# Altium PCB PCB1.PcbDoc (part 1 of 2)
Units mil, origin at the board's own origin, x right, y up, seen from the top; angles counter-clockwise.
Board outline 6000 x 4000 mil, 10 copper layers (Top Layer, Internal Plane 1, Internal Plane 5, Layer 2, Internal Plane 3, Internal Plane 4, Layer 4, Internal Plane 6, Internal Plane 2, Bottom Layer), stack 97.956 mil thick; 84 components, 218 nets, 925 pads, 573 vias.
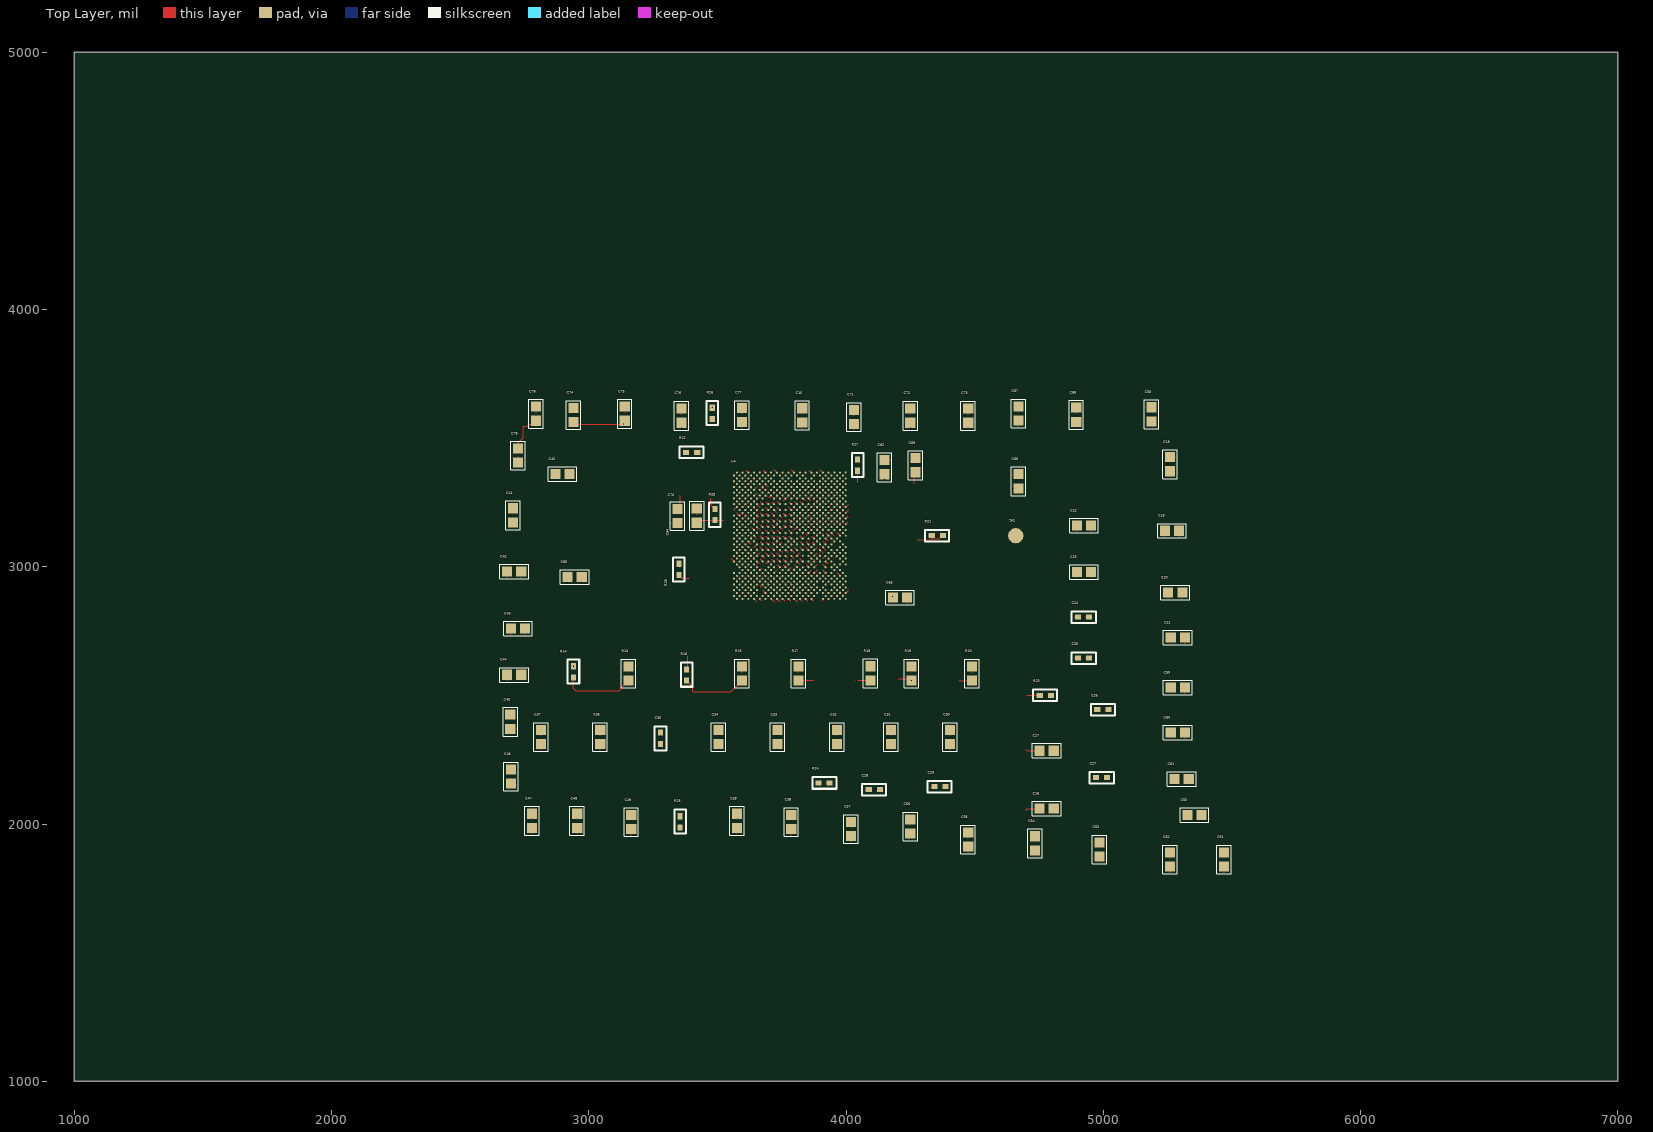
[diagram p0: Top Layer view]
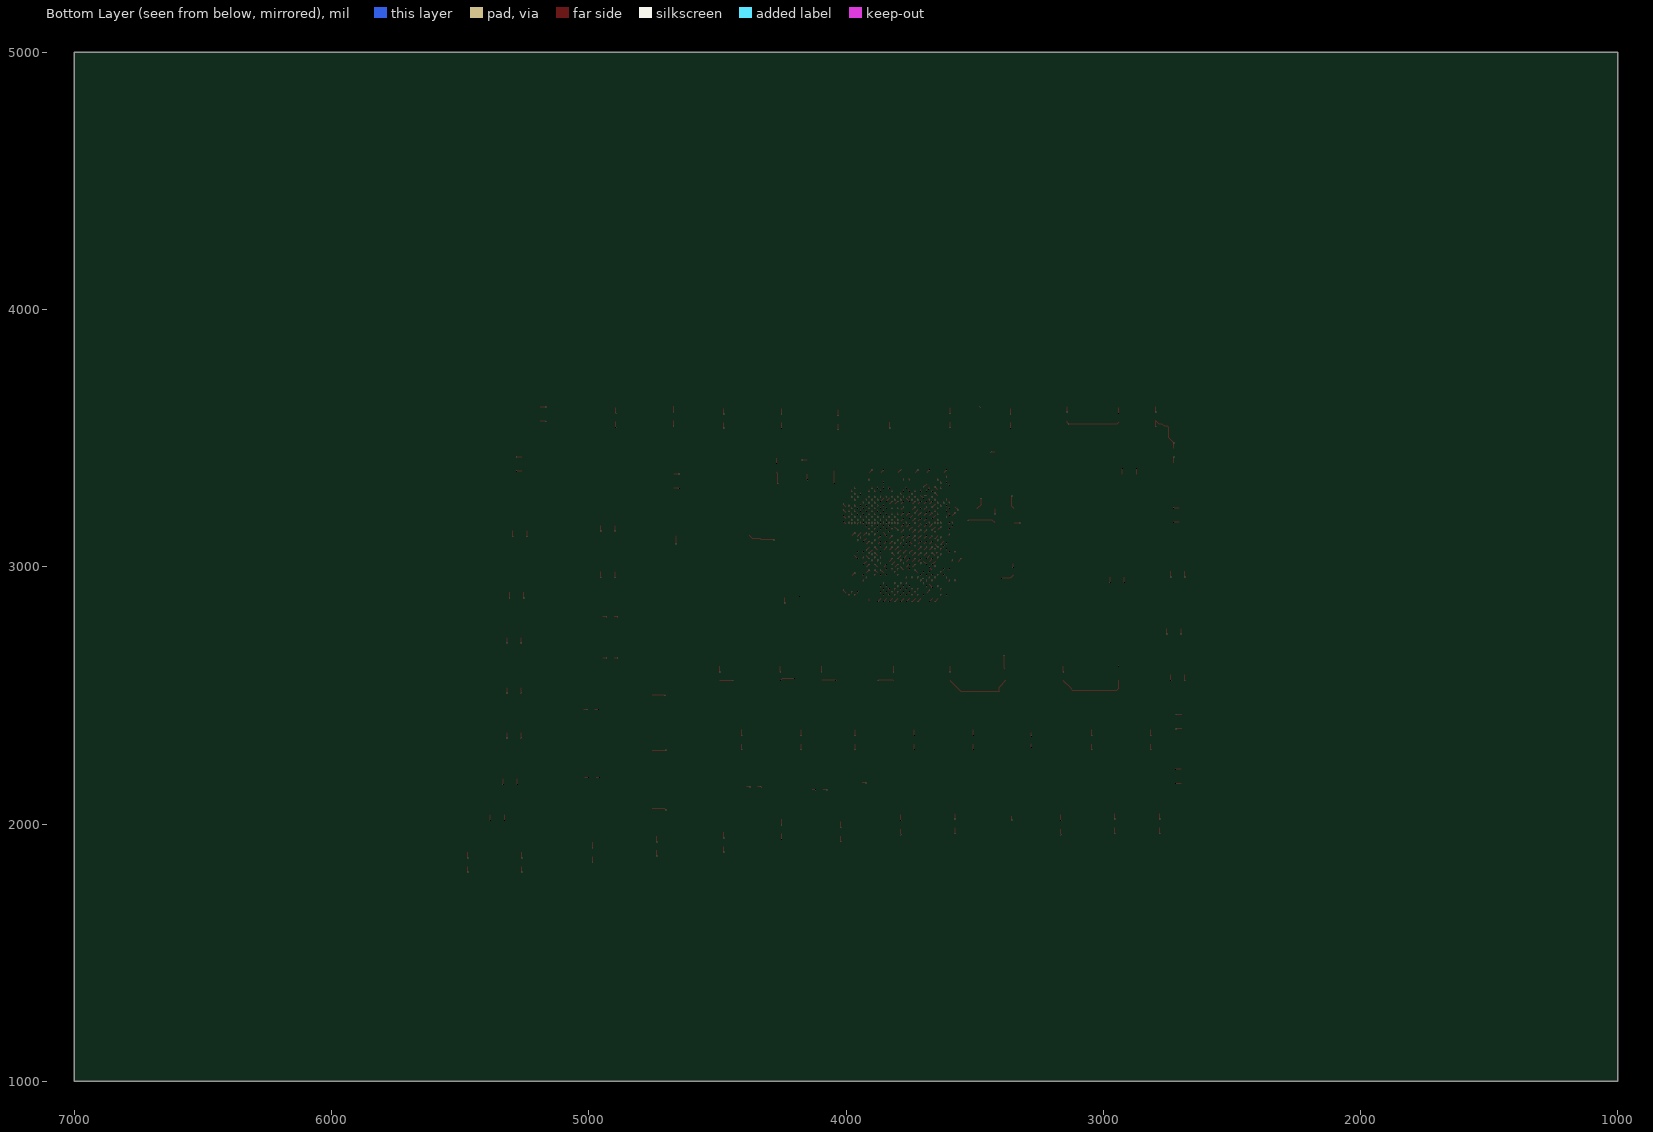
[diagram p1: Bottom Layer view, seen from below]
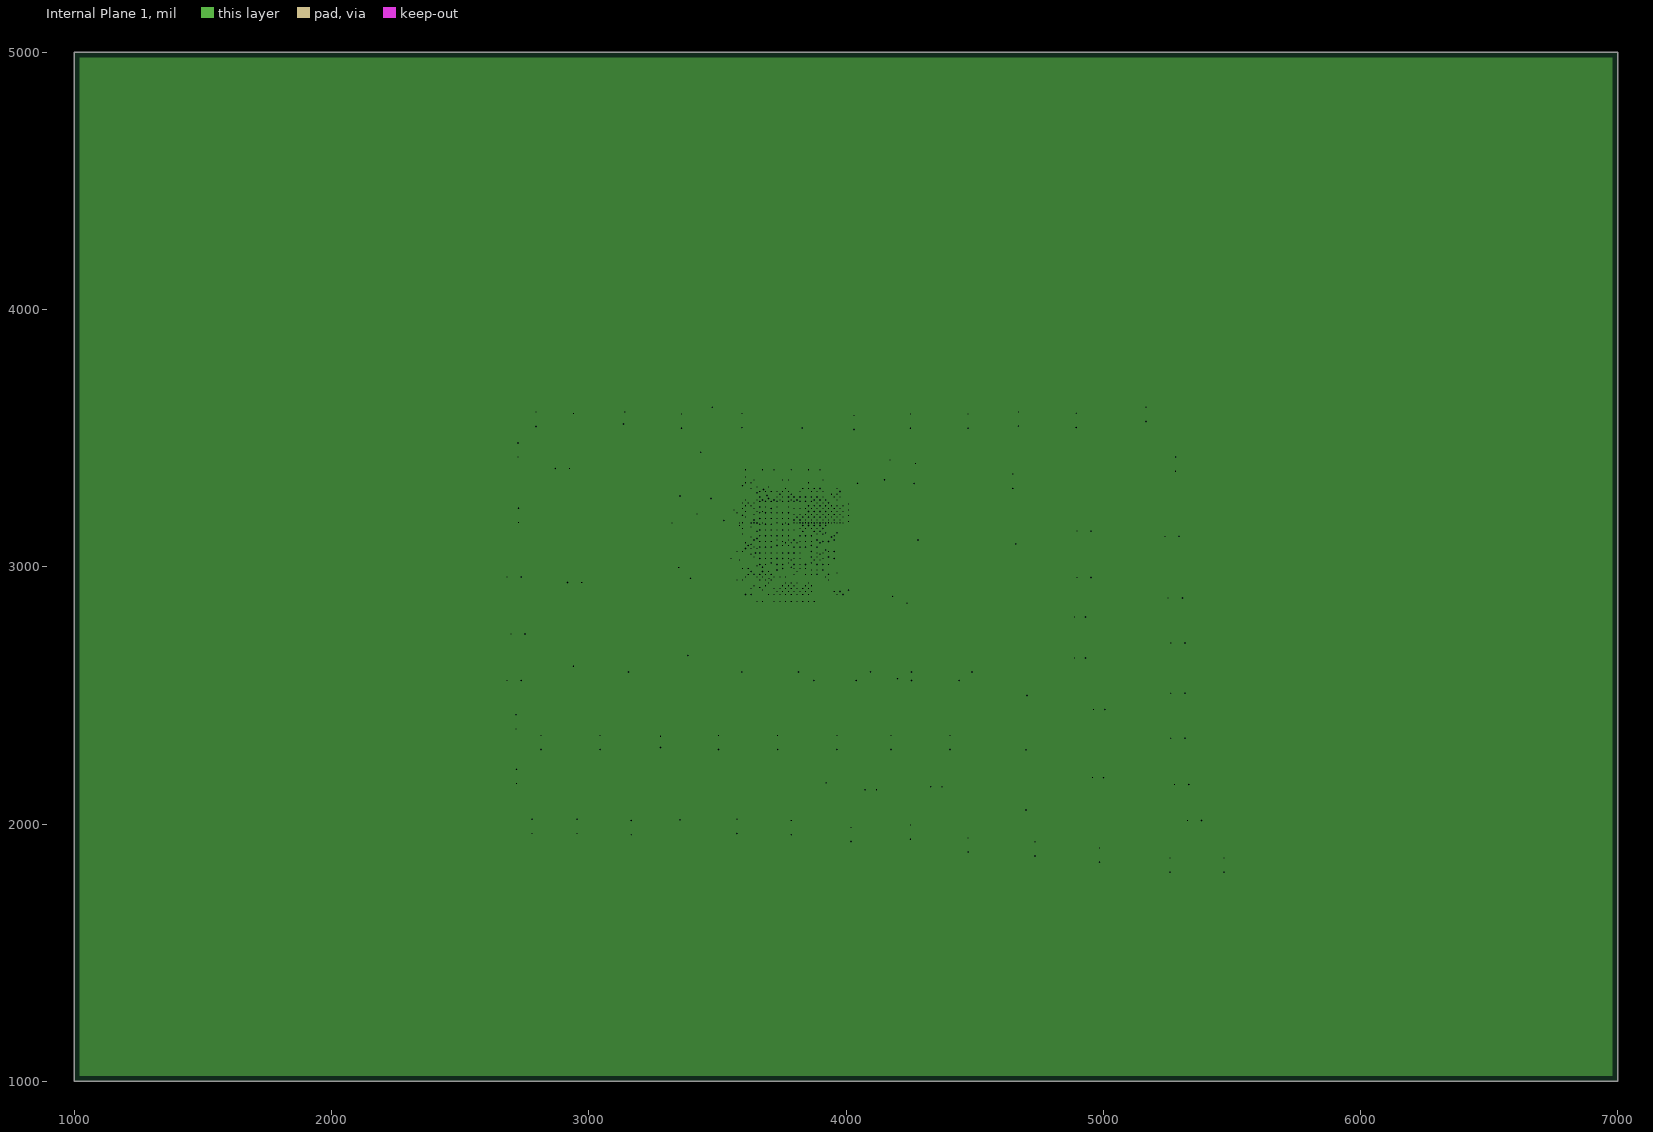
[diagram p2: Internal Plane 1, clearances drawn from the general rule]
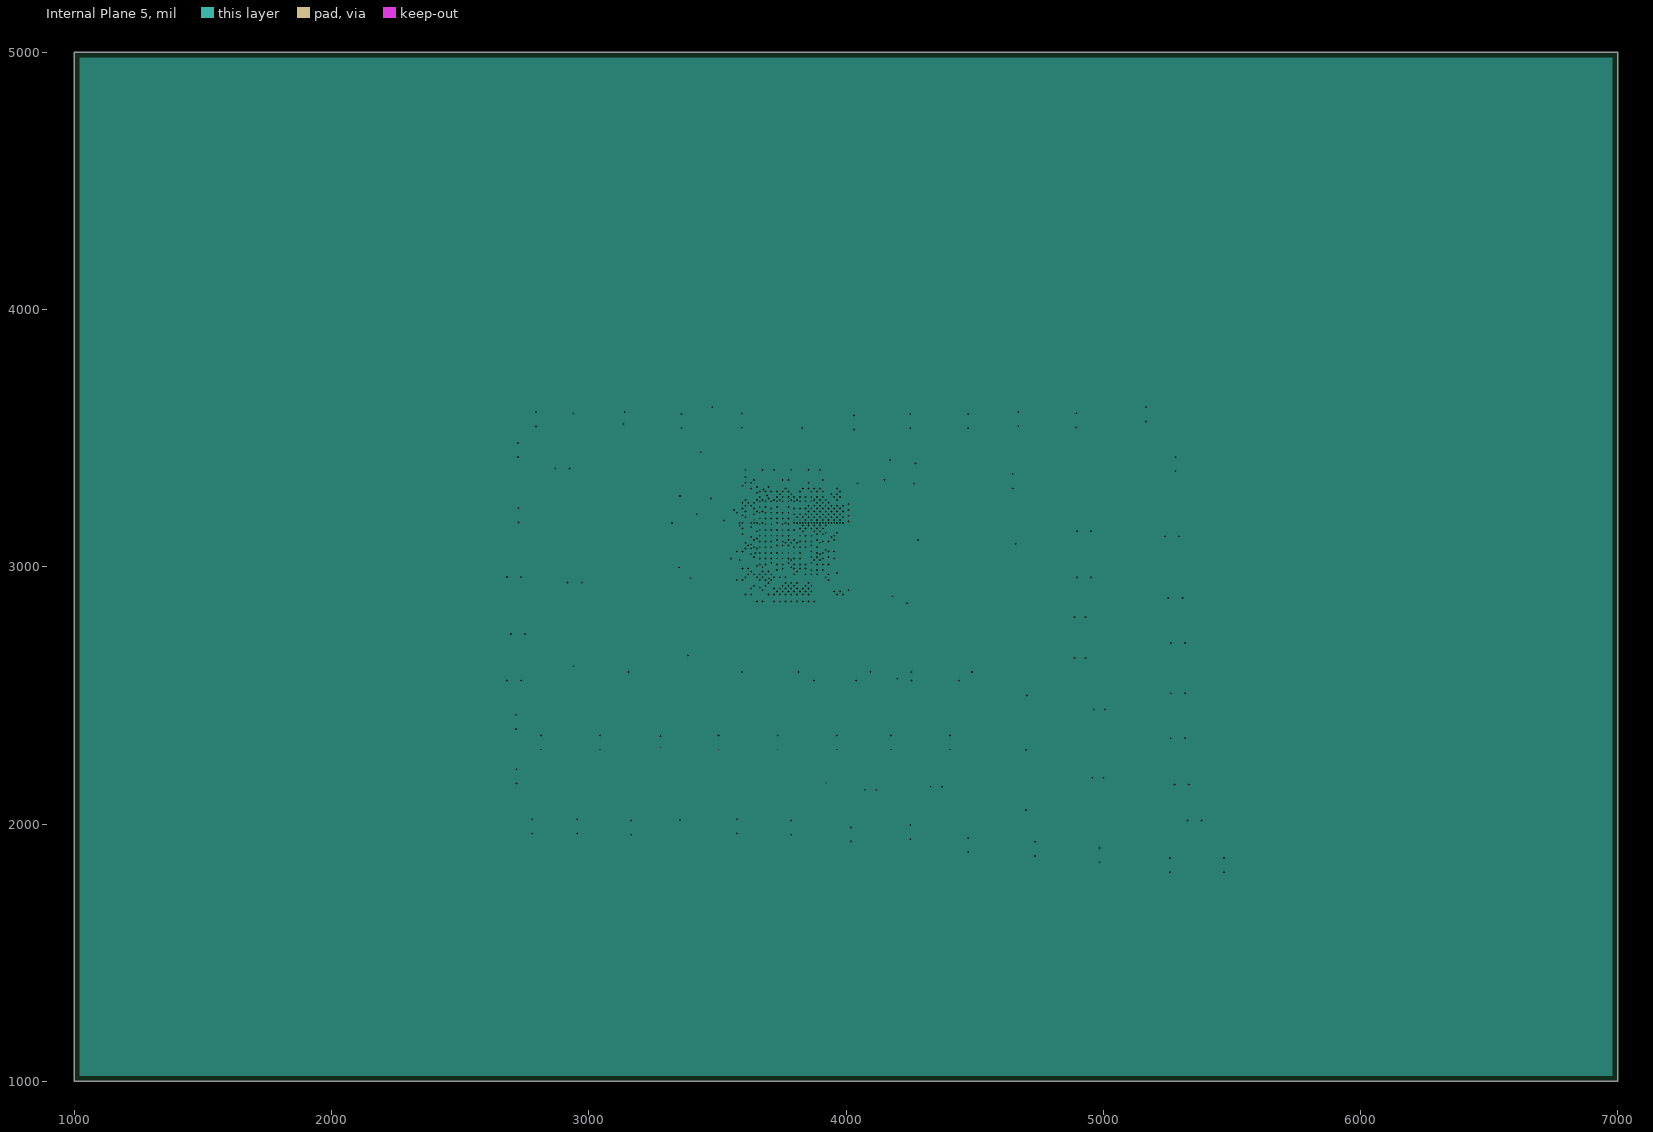
[diagram p3: Internal Plane 5, clearances drawn from the general rule]
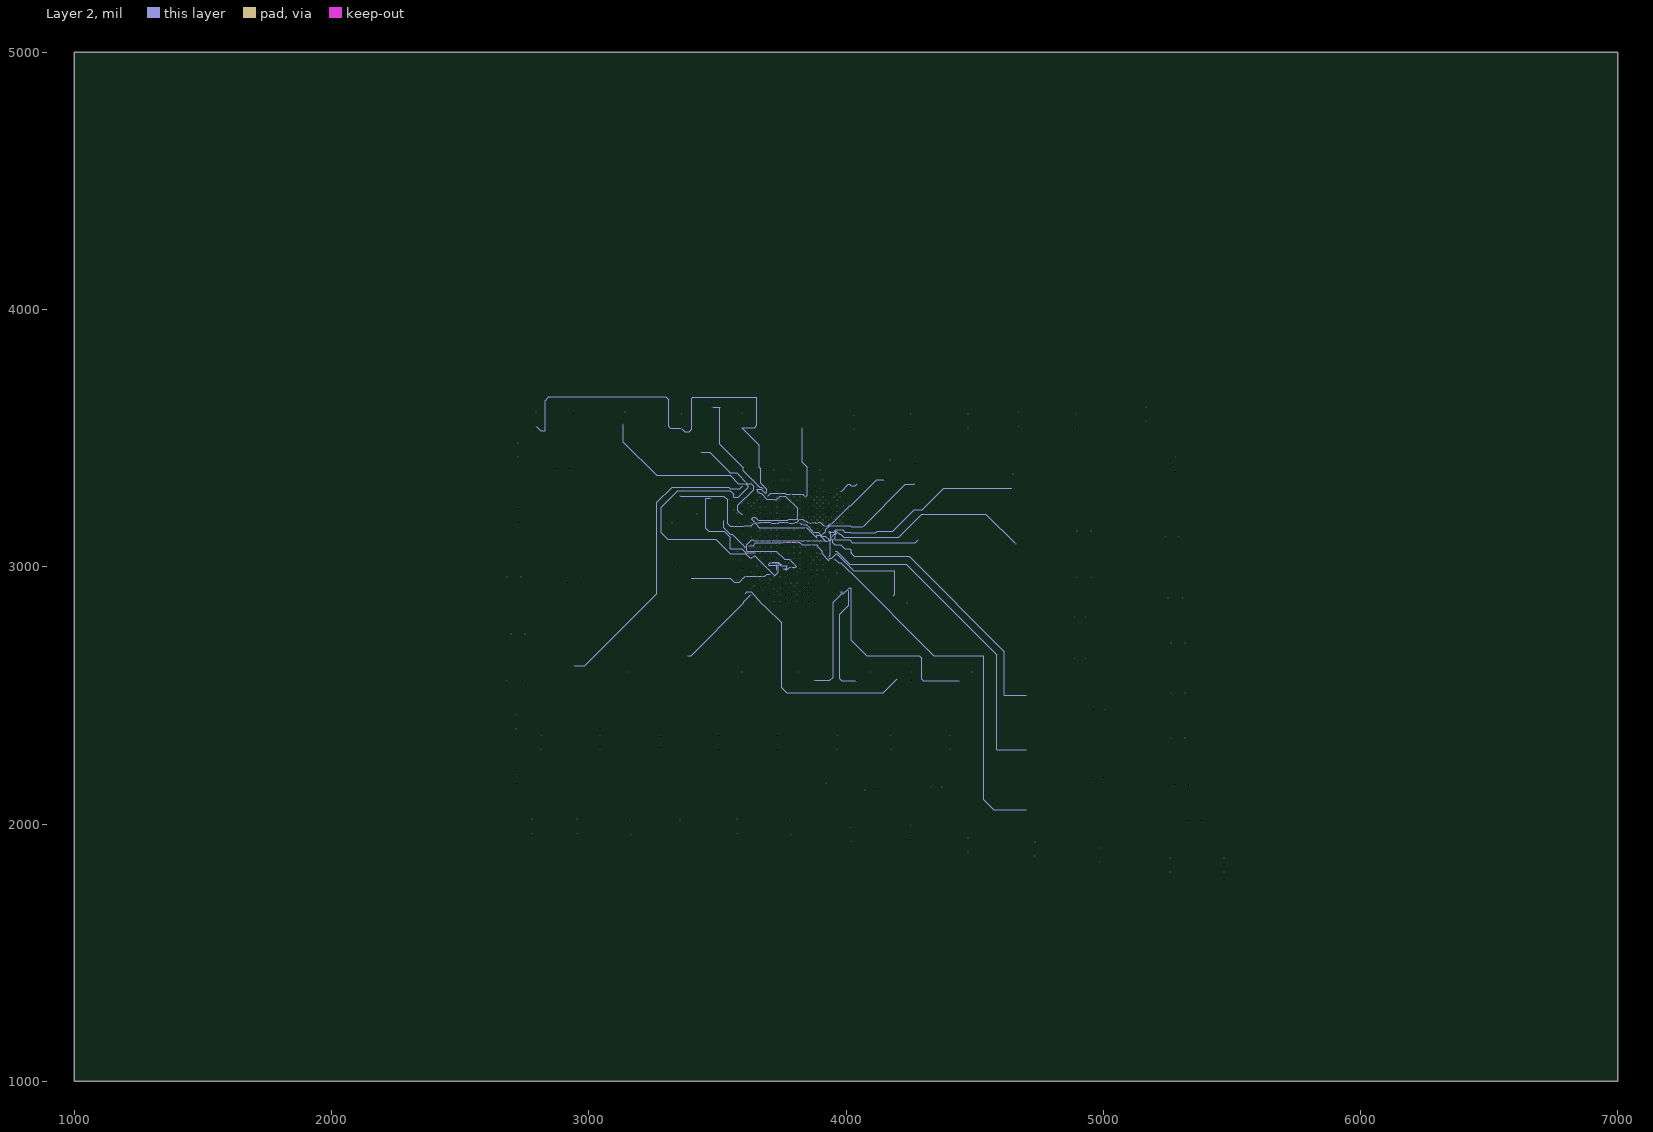
[diagram p4: Layer 2]
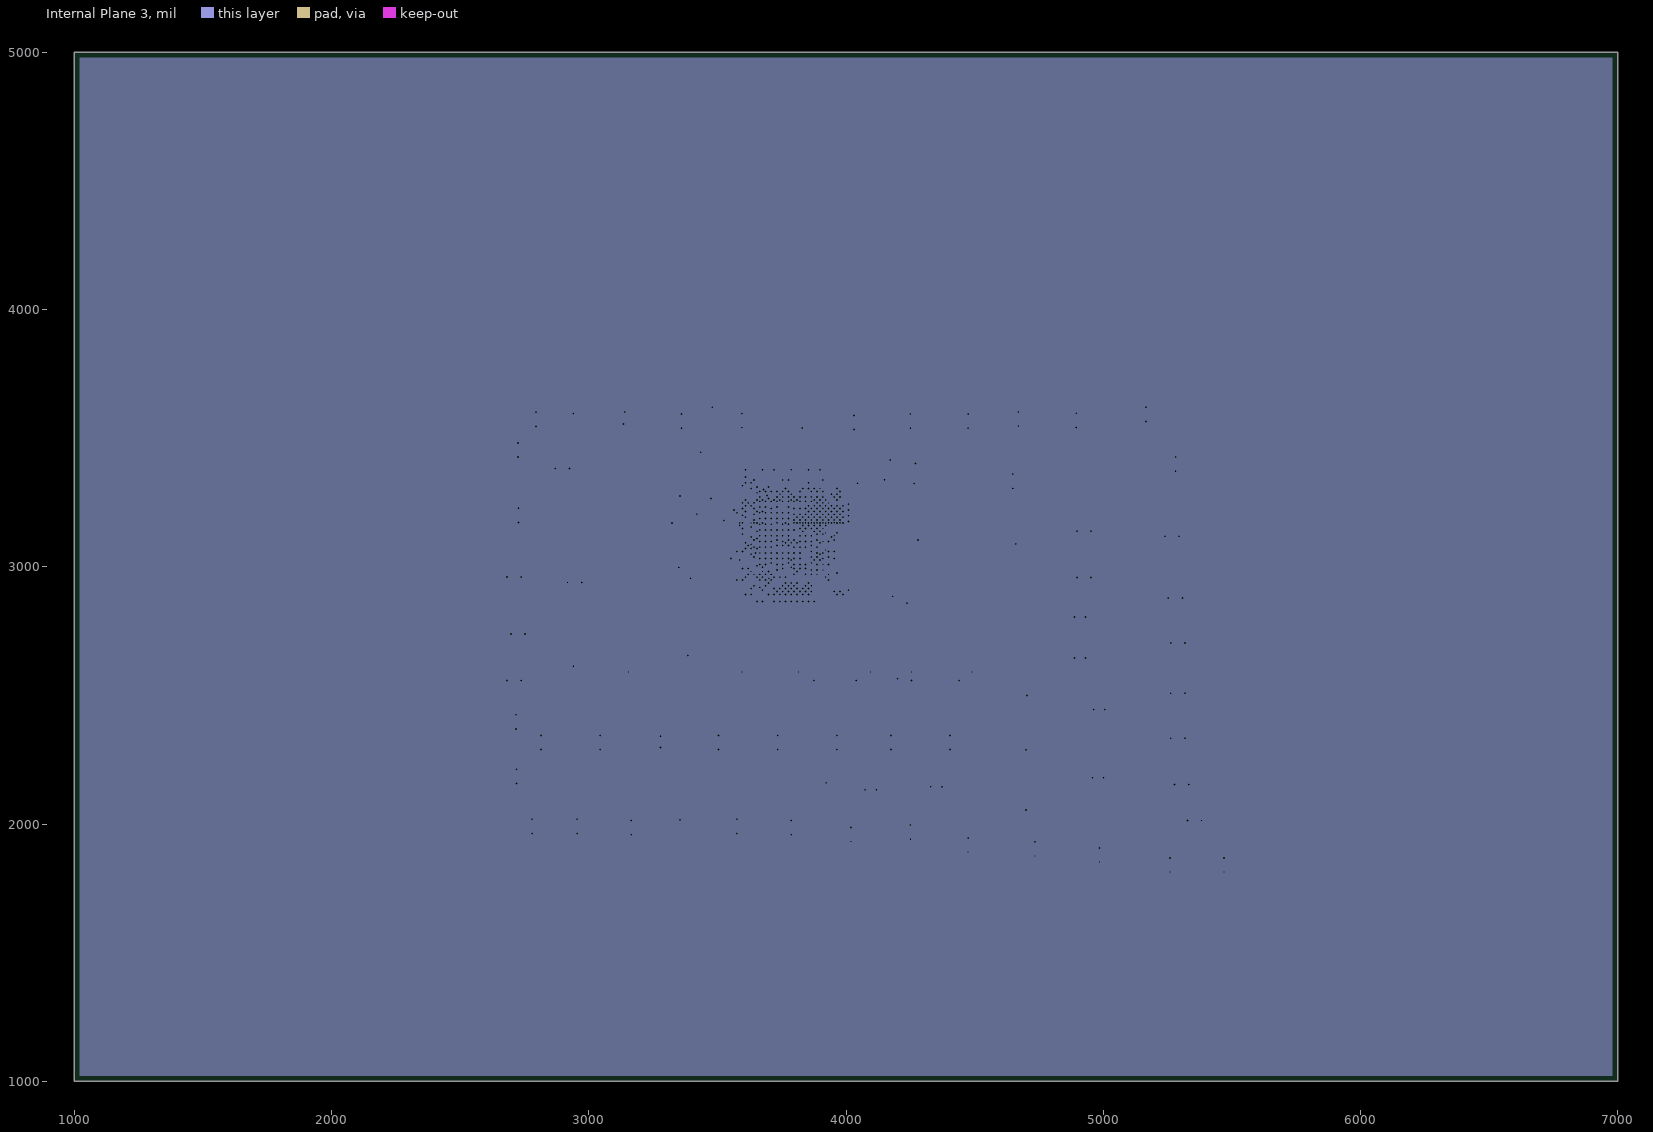
[diagram p5: Internal Plane 3, clearances drawn from the general rule]
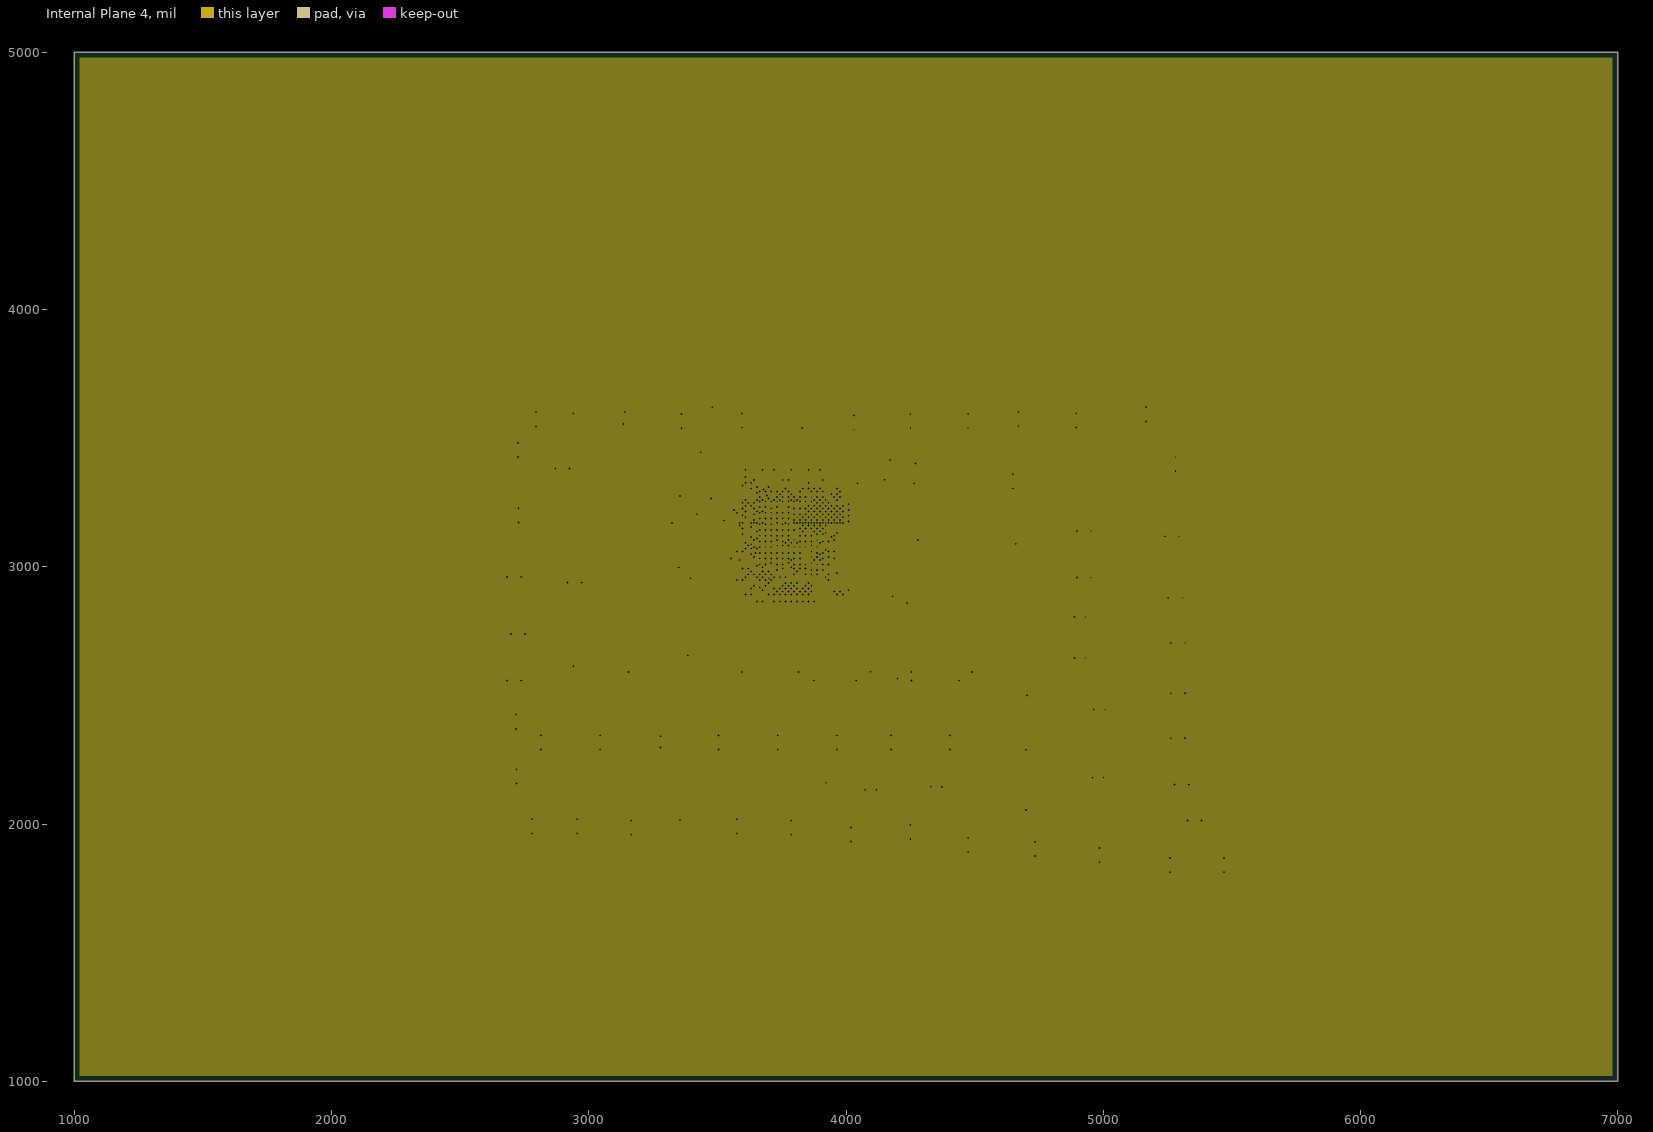
[diagram p6: Internal Plane 4, clearances drawn from the general rule]
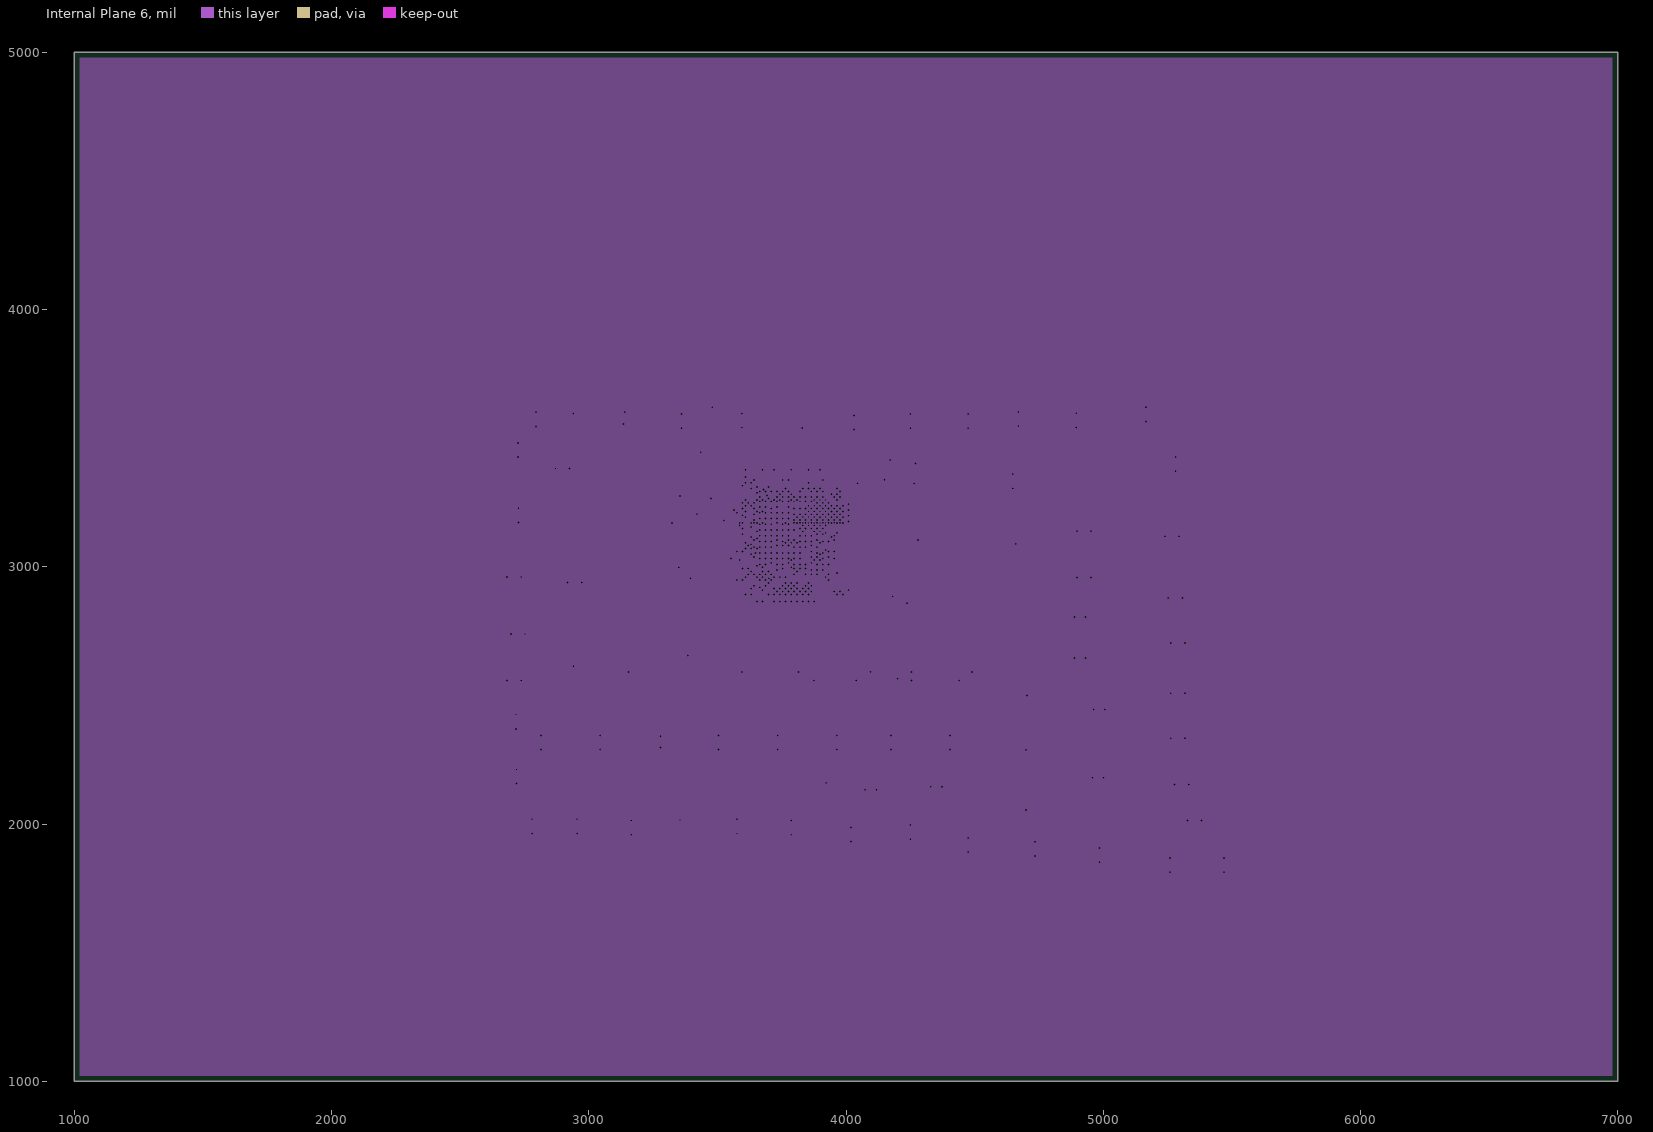
[diagram p7: Internal Plane 6, clearances drawn from the general rule]
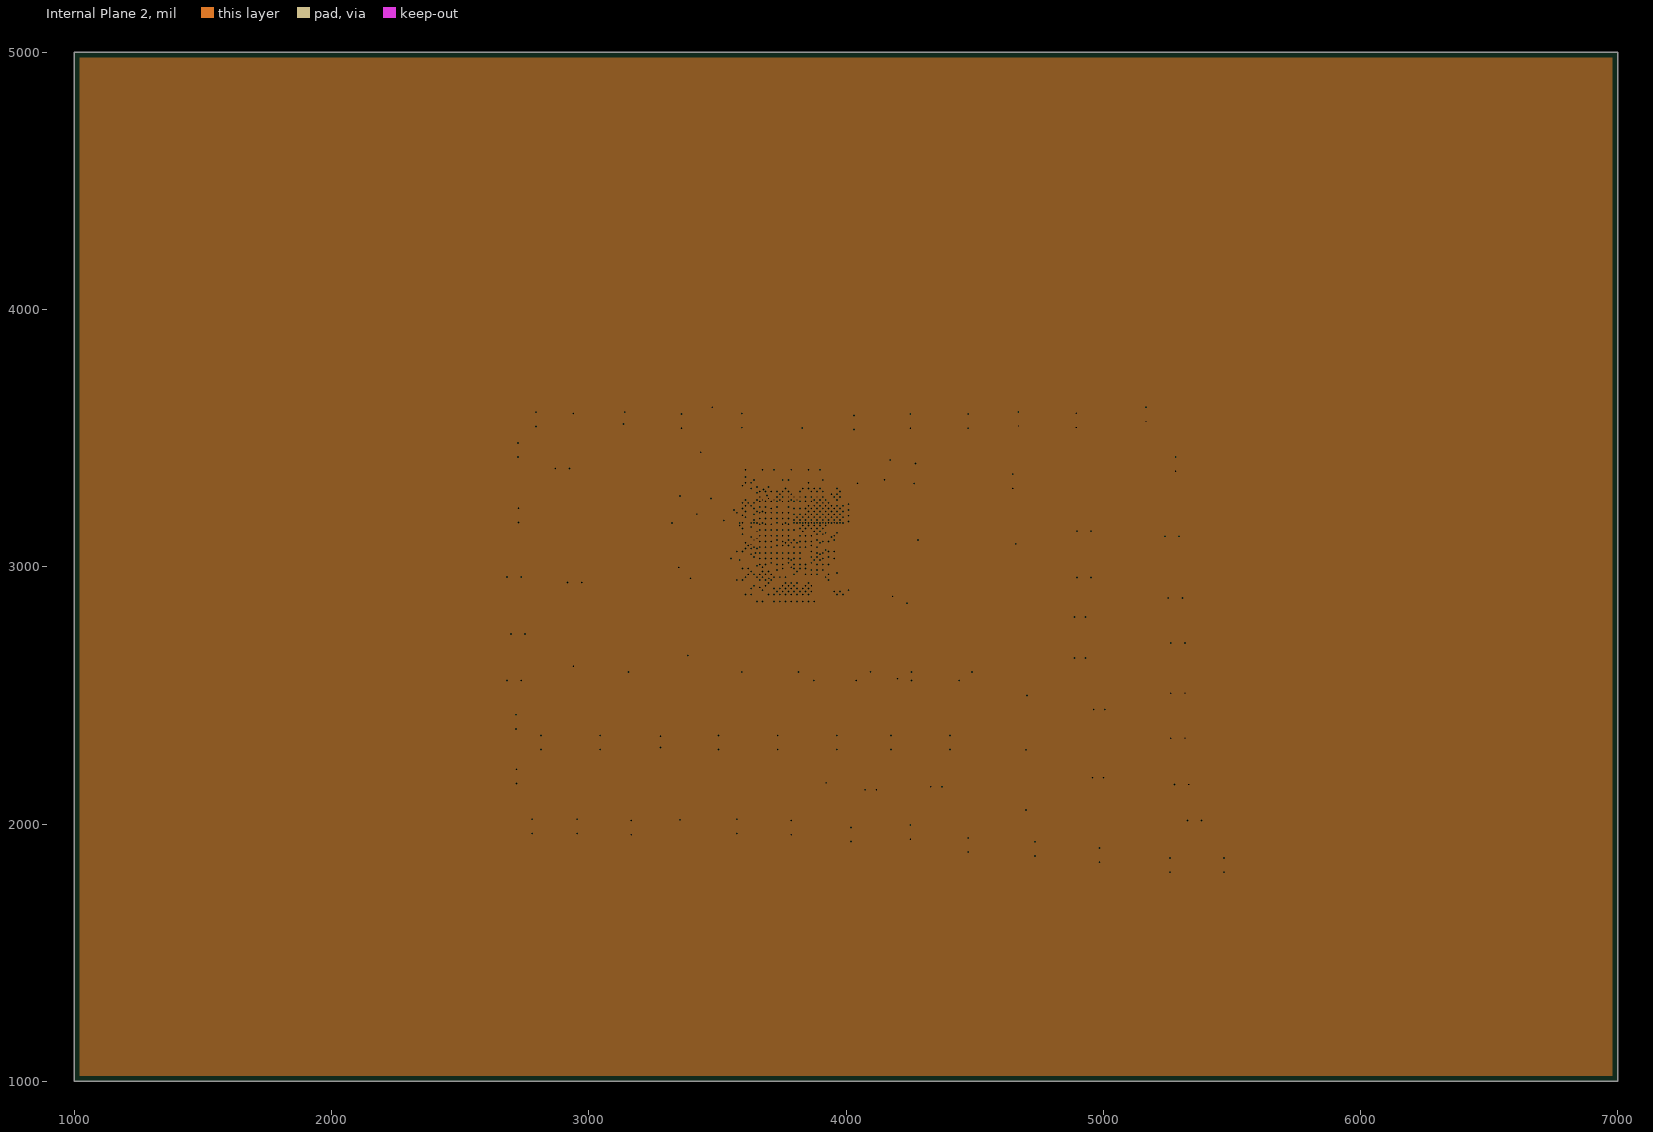
[diagram p8: Internal Plane 2, clearances drawn from the general rule]
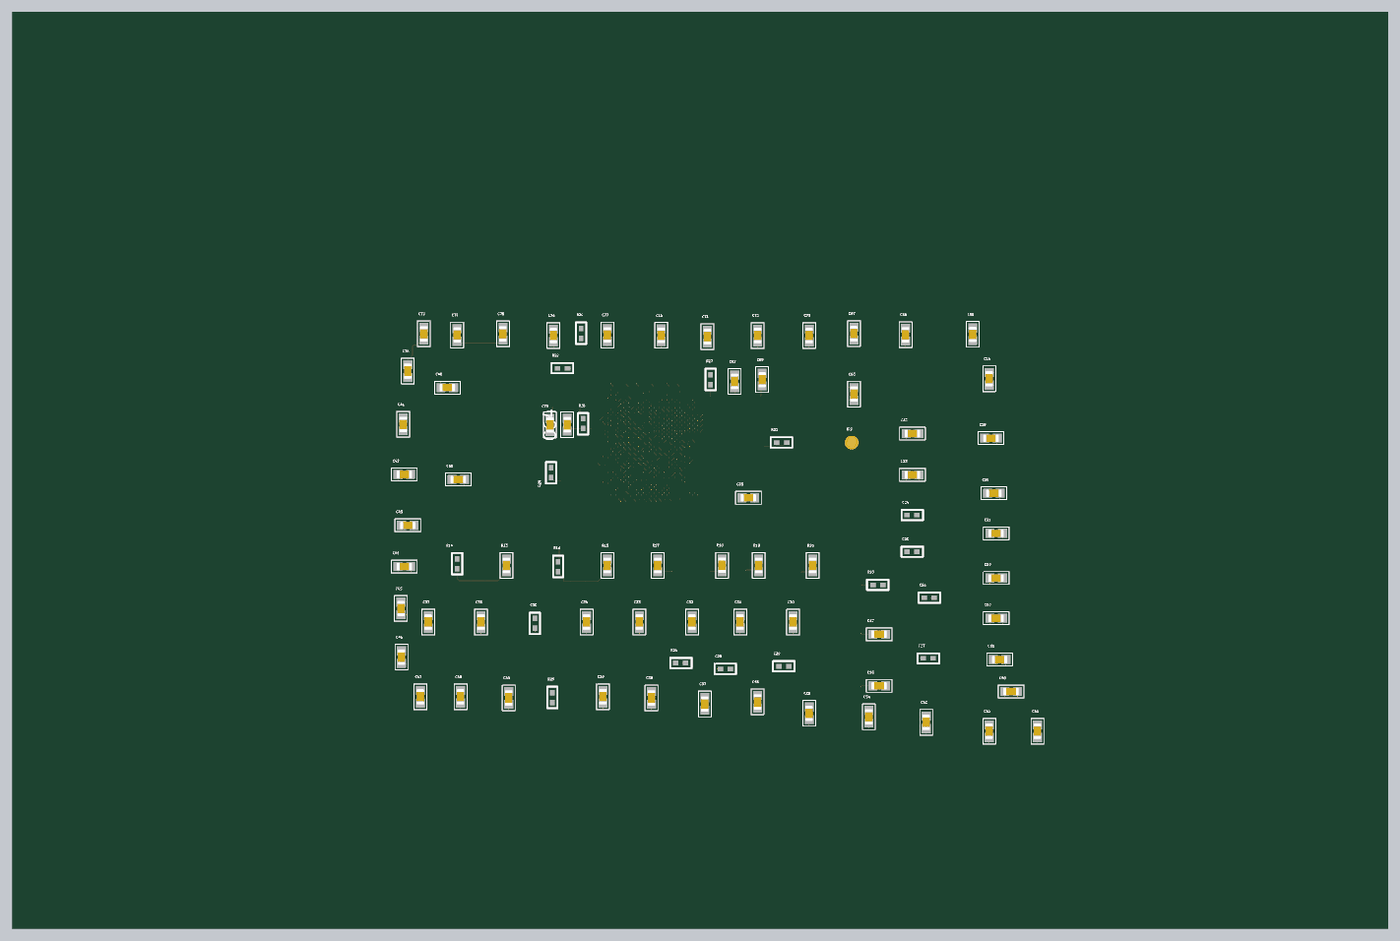
[diagram p10: 3D render of the assembled board from above, using the file's embedded part models]

## Layer stack, top to bottom
Top Solder: solder mask 0.4, Solder Resist, Dk 3.5
Top Layer: signal copper 1.4
Dielectric1: core 2.8, PP-006, Dk 4.1
Internal Plane 1: plane copper 1.4, net GND
Dielectric7: prepreg 12.6, FR-4, Dk 4.8
Internal Plane 5: plane copper 1.4, net VREG_S1
Dielectric11: core 12.6, FR-4, Dk 4.8
Layer 2: signal copper 1.3779
Dielectric2: prepreg 2.8, PP-006, Dk 4.1
Internal Plane 3: plane copper 1.4, net VREG_L5
Dielectric9: core 12.6, FR-4, Dk 4.8
Internal Plane 4: plane copper 1.4, net VREG_L3
Dielectric10: prepreg 12.6, FR-4, Dk 4.8
Layer 4: signal copper 1.3779
Dielectric3: core 2.8, PP-006, Dk 4.1
Internal Plane 6: plane copper 1.4, net VREG_S2
Dielectric12: prepreg 12.6, FR-4, Dk 4.8
Internal Plane 2: plane copper 1.4, net VREG_L2
Dielectric8: core 12.6, FR-4, Dk 4.8
Bottom Layer: signal copper 1.4
Bottom Solder: solder mask 0.4, Solder Resist, Dk 3.5

## Board outline
1000,1000 7000,1000 7000,5000 1000,5000

## Design rules (kind name [scope] priority, off if disabled: settings)
Clearance Clearance_BGA [WithinRoom('BGA')] p1: gap=1 ignorepadtopadclearanceinfootprint=FALSE except(0: Arc-Hole Track-Hole SMDPad-Hole THPad-Hole Via-Hole Fill-Hole Poly-Hole Region-Hole Text-Hole)
Clearance [All] p2: gap=1 ignorepadtopadclearanceinfootprint=FALSE except(0: Arc-Hole Track-Hole SMDPad-Hole THPad-Hole Via-Hole Fill-Hole Poly-Hole Region-Hole Text-Hole)
FanoutControl Fanout_BGA [IsBGA] p1: bgadir=NW bgaviamode=Centered fanoutstyle=BGA fanoutdirection=Alternating viagrid=1 // Fanout_BGA (Default Rule)
HoleSize [All] p1: absolutevalues=TRUE maxlimit=1 minlimit=1 maxpercent=80.000 minpercent=20.000
HoleToHoleClearance [All] p1: gap=1 allowstackedmicrovias=TRUE
MinimumSolderMaskSliver [All] p1: minsoldermaskwidth=1
PlaneClearance [All] p1: clearance=3
PlaneConnect [All] p1: planeconnectstyle=Relief reliefexpansion=3 reliefentries=4 reliefconductorwidth=3 reliefairgap=3
PolygonConnect [All] p1: connectstyle=Relief reliefconductorwidth=3 reliefentries=4 polygonreliefangle="90 Angle" airgapwidth=3
RoutingCorners [All] p1: cornerstyle=45-Degree minsetback=1 maxsetback=10
RoutingVias [All] p1: holewidth=1 width=2 viastyle="Through Hole" minholewidth=1 minwidth=2 maxholewidth=1 maxwidth=2
SilkToSilkClearance [All] p1: silktosilkclearance=0.1
SilkToSolderMaskClearance [IsPad] p1: minsilkscreentomaskgap=0.1 clearancetoexposedcopper=TRUE
SolderMaskExpansion [All] p1: expansion=0
Width Width_BGA [WithinRoom('BGA')] p1: maxlimit=3.5 minlimit=3.5 preferedwidth=3.5
Width [All] p2: maxlimit=3.5 minlimit=2 preferedwidth=3.5
21 further rules are at their usual default settings.

## Classes and differential pairs
component class Boot_Config_SW: R13 R14 R15 R16 R17 R18 R19 R20
component class Control: C15 C17 R21 R22 R23 TP2
component class Decoupling: C18 C19 C20 C21 C22 C23 C24 C25 C26 C27 C28 C29 C30 C31 C32 C33 C34 C35 C36 C37 C38 C39 C40 C41 C42 C43 C44 C45 C46 C47 C48 C49 C50 C51 C52 C53 C54 C55 C56 C57 C58 C59 C60 C61 R24 R25
component class GPIO_74-121: R27
component class LPDDR3: R26
component class PWR1: C62 C63 L1 R28
component class PWR2: C64 C65
component class PWR3: C66 C67 C68 C69 C70 C71 C72 C73 C74 C75 C76 C77 C78 C79
component class RF_Interface: R29

## Components (designator, comment, footprint, x,y, rotation, side; value= is the part's Value field where it differs from the comment)
C15 "0.1uF" "0603(I)/1608(M) - duplicate" 3830,3588.43 r270 top
C16 "33pF" "0603(I)/1608(M) - duplicate" 4780,2060 r180 top
C17 "33pF" "0603(I)/1608(M) - duplicate" 4780,2285 r180 top
C18 "1uF" "0603(I)/1608(M) - duplicate" 5260,3399.01 r90 top
C19 "1uF" "0603(I)/1608(M) - duplicate" 5267.44,3140 r0 top
C20 "1uF" "0603(I)/1608(M) - duplicate" 5280,2900 r0 top
C21 "1uF" "0603(I)/1608(M) - duplicate" 5290,2725 r0 top
C22 "1uF" "0603(I)/1608(M) - duplicate" 4925,3160.08 r0 top
C23 "4700uF" "0603(I)/1608(M) - duplicate" 4925,2980 r0 top
C24 "0.047uF" 0402 4923.53,2805 r0 top
C25 "0.047uF" 0402 4923.35,2645 r0 top
C26 "0.047uF" 0402 4998.35,2445 r0 top
C27 "4.7uF" 0402 4993.35,2180 r0 top
C28 "0.047uF" 0402 4110,2133.31 r180 top
C29 "0.047uF" 0402 4365,2145 r180 top
C30 "0.022uF" "0603(I)/1608(M) - duplicate" 4404.41,2338.35 r270 top
C31 "0.022uF" "0603(I)/1608(M) - duplicate" 4174.41,2338.35 r270 top
C32 "0.022uF" "0603(I)/1608(M) - duplicate" 3964.41,2338.35 r270 top
C33 "0.022uF" "0603(I)/1608(M) - duplicate" 3734.41,2338.35 r270 top
C34 "0.1uF" "0603(I)/1608(M) - duplicate" 3504.41,2338.35 r270 top
C35 "4.7uF" 0402 3279.41,2333.35 r270 top
C36 "22uF" "0603(I)/1608(M) - duplicate" 3044.41,2338.35 r270 top
C37 "22uF" "0603(I)/1608(M) - duplicate" 2814.41,2338.35 r270 top
C38 "0.022uF" "0603(I)/1608(M) - duplicate" 3787.28,2007.44 r270 top
C39 "0.022uF" "0603(I)/1608(M) - duplicate" 3575.59,2012.44 r270 top
C40 "0.022uF" "0603(I)/1608(M) - duplicate" 2897.56,3360 r180 top
C41 "4700uF" "0603(I)/1608(M) - duplicate" 2705,3200 r90 top
C42 "2200uF" "0603(I)/1608(M) - duplicate" 2710,2981.81 r0 top
C43 "2200uF" "0603(I)/1608(M) - duplicate" 2725,2760 r0 top
C44 "2200uF" "0603(I)/1608(M) - duplicate" 2710,2580 r0 top
C45 "0.01uF" "0603(I)/1608(M) - duplicate" 2695,2397.44 r90 top
C46 "4700uF" "0603(I)/1608(M) - duplicate" 2697.44,2185 r90 top
C47 "22uF" "0603(I)/1608(M) - duplicate" 2780,2012.44 r90 top
C48 "22uF" "0603(I)/1608(M) - duplicate" 2955,2012.44 r90 top
C49 "22uF" "0603(I)/1608(M) - duplicate" 3165,2007.44 r90 top
C50 "0.1uF" "0603(I)/1608(M) - duplicate" 5355,2035 r180 top
C51 "0.1uF" "0603(I)/1608(M) - duplicate" 5470,1862.03 r270 top
C52 "1uF" "0603(I)/1608(M) - duplicate" 5260,1862.03 r270 top
C53 "1uF" "0603(I)/1608(M) - duplicate" 4985,1900.87 r270 top
C54 "1uF" "0603(I)/1608(M) - duplicate" 4735,1925 r270 top
C55 "1uF" "0603(I)/1608(M) - duplicate" 4475,1940 r270 top
C56 "1uF" "0603(I)/1608(M) - duplicate" 4250,1990 r270 top
C57 "1uF" "0603(I)/1608(M) - duplicate" 4020,1980.76 r270 top
C58 "1uF" "0603(I)/1608(M) - duplicate" 5188.31,3592.44 r270 top
C59 "1uF" "0603(I)/1608(M) - duplicate" 5290,2530 r0 top
C60 "1uF" "0603(I)/1608(M) - duplicate" 5290,2355 r0 top
C61 "1uF" "0603(I)/1608(M) - duplicate" 5305,2175 r0 top
C62 "0.1uF" "0603(I)/1608(M) - duplicate" 4150,3387.44 r270 top
C63 "2.2uF" "0603(I)/1608(M) - duplicate" 4210,2880 r180 top
C64 "0.1uF" "0603(I)/1608(M) - duplicate" 3345,3197.44 r90 top
C65 "0.1uF" "0603(I)/1608(M) - duplicate" 2945,2960 r180 top
C66 "0.1uF" "0603(I)/1608(M) - duplicate" 4670,3332.44 r90 top
C67 "0.1uF" "0603(I)/1608(M) - duplicate" 4670,3595.87 r270 top
C68 "0.1uF" "0603(I)/1608(M) - duplicate" 4895,3590.87 r90 top
C69 "0.1uF" "0603(I)/1608(M) - duplicate" 4270,3395 r90 top
C70 "0.1uF" "0603(I)/1608(M) - duplicate" 3420,3198.63 r90 top
C71 "0.1uF" "0603(I)/1608(M) - duplicate" 4030.98,3582.56 r90 top
C72 "0.1uF" "0603(I)/1608(M) - duplicate" 4250,3587.56 r90 top
C73 "0.1uF" "0603(I)/1608(M) - duplicate" 4475,3587.56 r90 top
C74 "0.1uF" "0603(I)/1608(M) - duplicate" 2940,3590 r90 top
C75 "0.1uF" "0603(I)/1608(M) - duplicate" 3140,3595 r270 top
C76 "0.1uF" "0603(I)/1608(M) - duplicate" 3360,3587.56 r90 top
C77 "0.1uF" "0603(I)/1608(M) - duplicate" 3595,3590 r90 top
C78 "0.1uF" "0603(I)/1608(M) - duplicate" 2725,3432.44 r270 top
C79 "0.1uF" "0603(I)/1608(M) - duplicate" 2795,3595 r90 top
R13 "10K" "0603(I)/1608(M) - duplicate" 3155,2585 r270 top
R14 "0" 0402 2940,2591.66 r90 top
R15 "10K" "0603(I)/1608(M) - duplicate" 3595,2585 r270 top
R16 "0" 0402 3380,2579.59 r90 top
R17 "10K" "0603(I)/1608(M) - duplicate" 3815,2585 r270 top
R18 "10K" "0603(I)/1608(M) - duplicate" 4095,2585.75 r270 top
R19 "10K" "0603(I)/1608(M) - duplicate" 4255,2585 r270 top
R20 "10K" "0603(I)/1608(M) - duplicate" 4490,2585 r270 top
R21 "0" 0402 4355,3120.71 r180 top
R22 "0" 0402 3400,3445 r180 top
R23 "200" 0402 4775,2500 r180 top
R24 "0" 0402 3915,2160 r0 top
R25 "0" 0402 3355,2008.35 r90 top
R26 "0" 0402 3480,3596.65 r90 top
R27 "0" 0402 4045,3395 r90 top
R28 "0" 0402 3490,3203.35 r270 top
R29 "3.92K" 0402 3350,2990 r270 top
TP2 "" TP 4660,3120.71 r180 top
U4 "APQ8016" APQ8016 3709.29,6897.76 r0 top

## Footprints (in the part's own frame and the unit in brackets; to place one, negate y for a bottom-side part, rotate by r counter-clockwise, add the part's x,y. Pads: shape width x height; smd on the part's side, far side on the other; paste and mask are expansions set on the pad)
0402 [mm]
  rect 0.6x0.5 smd: 1(-0.55,0) 2(0.55,0)
  silkscreen extent -1.17,-0.58 1.22,0.56
"0603(I)/1608(M) - duplicate" [mm]
  rect 1x1 smd: 1(-0.7,0) 2(0.7,0)
  silkscreen extent -1.42,-0.71 1.42,0.71, body extent -0.88,-0.44 0.87,0.43, height 0.78
APQ8016 [mil]
  rrect100% 7.87x7.87 smd: A2(-133.7,-3531.93) A4(-111.42,-3531.93) A6(-89.13,-3531.93) A8(-66.85,-3531.93) A10(-44.57,-3531.93) A12(-22.28,-3531.93) A14(0,-3531.93) A16(22.28,-3531.93) A18(44.57,-3531.93) A20(66.85,-3531.93) A22(89.13,-3531.93) A24(111.42,-3531.93) A26(133.7,-3531.93) A28(155.98,-3531.93) A30(178.27,-3531.93) A32(200.55,-3531.93) A34(222.83,-3531.93) A36(245.12,-3531.93) A38(267.4,-3531.93) A40(289.69,-3531.93) AA2(-133.7,-3754.76) AA4(-111.42,-3754.76) AA6(-89.13,-3754.76) AA8(-66.85,-3754.76) AA24(111.42,-3754.76) AA26(133.7,-3754.76) AA28(155.98,-3754.76) AA30(178.27,-3754.76) AA32(200.55,-3754.76) AA34(222.83,-3754.76) AA36(245.12,-3754.76) AA38(267.4,-3754.76) AA40(289.69,-3754.76) AB1(-144.84,-3765.91) AB3(-122.56,-3765.91) AB5(-100.28,-3765.91) AB7(-77.99,-3765.91) AB9(-55.71,-3765.91) AB11(-33.43,-3765.91) AB13(-11.14,-3765.91) AB15(11.14,-3765.91) AB17(33.43,-3765.91) AB19(55.71,-3765.91) AB21(77.99,-3765.91) AB23(100.28,-3765.91) AB25(122.56,-3765.91) AB27(144.84,-3765.91) AB29(167.13,-3765.91) AB31(189.41,-3765.91) AB35(233.98,-3765.91) AB39(278.54,-3765.91) AC2(-133.7,-3777.05) AC4(-111.42,-3777.05) AC6(-89.13,-3777.05) AC8(-66.85,-3777.05) AC30(178.27,-3777.05) AC32(200.55,-3777.05) AC34(222.83,-3777.05) AC38(267.4,-3777.05) AC40(289.69,-3777.05) AD1(-144.84,-3788.19) AD3(-122.56,-3788.19) AD5(-100.28,-3788.19) AD7(-77.99,-3788.19) AD11(-33.43,-3788.19) AD13(-11.14,-3788.19) AD15(11.14,-3788.19) AD17(33.43,-3788.19) AD19(55.71,-3788.19) AD21(77.99,-3788.19) AD23(100.28,-3788.19) AD25(122.56,-3788.19) AD27(144.84,-3788.19) AD29(167.13,-3788.19) AD31(189.41,-3788.19) AD33(211.69,-3788.19) AD35(233.98,-3788.19) AD37(256.26,-3788.19) AE2(-133.7,-3799.33) AE4(-111.42,-3799.33) AE6(-89.13,-3799.33) AE8(-66.85,-3799.33) AE16(22.28,-3799.33) AE20(66.85,-3799.33) AE22(89.13,-3799.33) AE30(178.27,-3799.33) AE36(245.12,-3799.33) AE38(267.4,-3799.33) AF1(-144.84,-3810.47) AF3(-122.56,-3810.47) AF5(-100.28,-3810.47) AF9(-55.71,-3810.47) AF11(-33.43,-3810.47) AF13(-11.14,-3810.47) AF15(11.14,-3810.47) AF17(33.43,-3810.47) AF19(55.71,-3810.47) AF21(77.99,-3810.47) AF23(100.28,-3810.47) AF25(122.56,-3810.47) AF27(144.84,-3810.47) AF29(167.13,-3810.47) AF31(189.41,-3810.47) AF33(211.69,-3810.47) AF35(233.98,-3810.47) AF39(278.54,-3810.47) AG2(-133.7,-3821.61) AG4(-111.42,-3821.61) AG6(-89.13,-3821.61) AG16(22.28,-3821.61) AG18(44.57,-3821.61) AG20(66.85,-3821.61) AG28(155.98,-3821.61) AG32(200.55,-3821.61) AG34(222.83,-3821.61) AG38(267.4,-3821.61) AG40(289.69,-3821.61) AH1(-144.84,-3832.76) AH3(-122.56,-3832.76) AH5(-100.28,-3832.76) AH7(-77.99,-3832.76) AH9(-55.71,-3832.76) AH11(-33.43,-3832.76) AH13(-11.14,-3832.76) AH15(11.14,-3832.76) AH17(33.43,-3832.76) AH19(55.71,-3832.76) AH21(77.99,-3832.76) AH23(100.28,-3832.76) AH25(122.56,-3832.76) AH27(144.84,-3832.76) AH29(167.13,-3832.76) AH31(189.41,-3832.76) AH35(233.98,-3832.76) AH37(256.26,-3832.76) AH39(278.54,-3832.76) AJ2(-133.7,-3843.9) AJ4(-111.42,-3843.9) AJ6(-89.13,-3843.9) AJ8(-66.85,-3843.9) AJ28(155.98,-3843.9) AJ34(222.83,-3843.9) AJ36(245.12,-3843.9) AJ38(267.4,-3843.9) AJ40(289.69,-3843.9) AK1(-144.84,-3855.04) AK3(-122.56,-3855.04) AK5(-100.28,-3855.04) AK7(-77.99,-3855.04) AK9(-55.71,-3855.04) AK11(-33.43,-3855.04) AK13(-11.14,-3855.04) AK15(11.14,-3855.04) AK17(33.43,-3855.04) AK19(55.71,-3855.04) AK21(77.99,-3855.04) AK23(100.28,-3855.04) AK25(122.56,-3855.04) AK27(144.84,-3855.04) AK29(167.13,-3855.04) AK31(189.41,-3855.04) AK33(211.69,-3855.04) AK35(233.98,-3855.04) AK37(256.26,-3855.04) AK39(278.54,-3855.04) AL2(-133.7,-3866.18) AL4(-111.42,-3866.18) AL6(-89.13,-3866.18) AL8(-66.85,-3866.18) AL28(155.98,-3866.18) AL30(178.27,-3866.18) AL34(222.83,-3866.18) AL38(267.4,-3866.18) AL40(289.69,-3866.18) AM1(-144.84,-3877.32) AM3(-122.56,-3877.32) AM5(-100.28,-3877.32) AM7(-77.99,-3877.32) AM9(-55.71,-3877.32) AM11(-33.43,-3877.32) AM13(-11.14,-3877.32) AM15(11.14,-3877.32) AM17(33.43,-3877.32) AM19(55.71,-3877.32) AM21(77.99,-3877.32) AM23(100.28,-3877.32) AM25(122.56,-3877.32) AM27(144.84,-3877.32) AM29(167.13,-3877.32) AM31(189.41,-3877.32) AM33(211.69,-3877.32) AM35(233.98,-3877.32) AM39(278.54,-3877.32) AN2(-133.7,-3888.46) AN4(-111.42,-3888.46) AN6(-89.13,-3888.46) AN8(-66.85,-3888.46) AN14(0,-3888.46) AN20(66.85,-3888.46) AN28(155.98,-3888.46) AN36(245.12,-3888.46) AN38(267.4,-3888.46) AN40(289.69,-3888.46) AP3(-122.56,-3899.61) AP5(-100.28,-3899.61) AP7(-77.99,-3899.61) AP9(-55.71,-3899.61) AP13(-11.14,-3899.61) AP15(11.14,-3899.61) AP17(33.43,-3899.61) AP19(55.71,-3899.61) AP23(100.28,-3899.61) AP25(122.56,-3899.61) AP27(144.84,-3899.61) AP29(167.13,-3899.61) AP33(211.69,-3899.61) AP35(233.98,-3899.61) AP37(256.26,-3899.61) AR4(-111.42,-3910.75) AR6(-89.13,-3910.75) AR8(-66.85,-3910.75) AR10(-44.57,-3910.75) AR12(-22.28,-3910.75) AR14(0,-3910.75) AR18(44.57,-3910.75) AR20(66.85,-3910.75) AR22(89.13,-3910.75) AR24(111.42,-3910.75) AR26(133.7,-3910.75) AR36(245.12,-3910.75) AR38(267.4,-3910.75) AT1(-144.84,-3921.89) AT3(-122.56,-3921.89) AT5(-100.28,-3921.89) AT7(-77.99,-3921.89) AT9(-55.71,-3921.89) AT11(-33.43,-3921.89) AT13(-11.14,-3921.89) AT15(11.14,-3921.89) AT17(33.43,-3921.89) AT19(55.71,-3921.89) AT21(77.99,-3921.89) AT23(100.28,-3921.89) AT25(122.56,-3921.89) AT27(144.84,-3921.89) AT29(167.13,-3921.89) AT31(189.41,-3921.89) AT33(211.69,-3921.89) AT35(233.98,-3921.89) AT39(278.54,-3921.89) AU2(-133.7,-3933.03) AU4(-111.42,-3933.03) AU6(-89.13,-3933.03) AU8(-66.85,-3933.03) AU10(-44.57,-3933.03) AU12(-22.28,-3933.03) AU14(0,-3933.03) AU16(22.28,-3933.03) AU18(44.57,-3933.03) AU20(66.85,-3933.03) AU22(89.13,-3933.03) AU24(111.42,-3933.03) AU26(133.7,-3933.03) AU28(155.98,-3933.03) AU30(178.27,-3933.03) AU32(200.55,-3933.03) AU34(222.83,-3933.03) AU36(245.12,-3933.03) AU38(267.4,-3933.03) AU40(289.69,-3933.03) AV1(-144.84,-3944.17) AV3(-122.56,-3944.17) AV5(-100.28,-3944.17) AV7(-77.99,-3944.17) AV9(-55.71,-3944.17) AV11(-33.43,-3944.17) AV13(-11.14,-3944.17) AV15(11.14,-3944.17) AV17(33.43,-3944.17) AV19(55.71,-3944.17) AV21(77.99,-3944.17) AV23(100.28,-3944.17) AV25(122.56,-3944.17) AV27(144.84,-3944.17) AV29(167.13,-3944.17) AV31(189.41,-3944.17) AV33(211.69,-3944.17) AV35(233.98,-3944.17) AV37(256.26,-3944.17) AV39(278.54,-3944.17) AW2(-133.7,-3955.32) AW4(-111.42,-3955.32) AW6(-89.13,-3955.32) AW8(-66.85,-3955.32) AW10(-44.57,-3955.32) AW12(-22.28,-3955.32) AW14(0,-3955.32) AW16(22.28,-3955.32) AW18(44.57,-3955.32) AW20(66.85,-3955.32) AW22(89.13,-3955.32) AW24(111.42,-3955.32) AW26(133.7,-3955.32) AW28(155.98,-3955.32) AW30(178.27,-3955.32) AW32(200.55,-3955.32) AW34(222.83,-3955.32) AW36(245.12,-3955.32) AW38(267.4,-3955.32) AW40(289.69,-3955.32) AY1(-144.84,-3966.46) AY3(-122.56,-3966.46) AY5(-100.28,-3966.46) AY7(-77.99,-3966.46) AY9(-55.71,-3966.46) AY11(-33.43,-3966.46) AY13(-11.14,-3966.46) AY15(11.14,-3966.46) AY17(33.43,-3966.46) AY19(55.71,-3966.46) AY21(77.99,-3966.46) AY23(100.28,-3966.46) AY25(122.56,-3966.46) AY27(144.84,-3966.46) AY29(167.13,-3966.46) AY33(211.69,-3966.46) AY35(233.98,-3966.46) AY37(256.26,-3966.46) AY39(278.54,-3966.46) B1(-144.84,-3543.07) B3(-122.56,-3543.07) B5(-100.28,-3543.07) B7(-77.99,-3543.07) B9(-55.71,-3543.07) B11(-33.43,-3543.07) B13(-11.14,-3543.07) B15(11.14,-3543.07) B17(33.43,-3543.07) B19(55.71,-3543.07) B21(77.99,-3543.07) B23(100.28,-3543.07) B25(122.56,-3543.07) B29(167.13,-3543.07) B31(189.41,-3543.07) B33(211.69,-3543.07) B35(233.98,-3543.07) B37(256.26,-3543.07) B39(278.54,-3543.07) BA2(-133.7,-3977.6) BA4(-111.42,-3977.6) BA6(-89.13,-3977.6) BA8(-66.85,-3977.6) BA12(-22.28,-3977.6) BA14(0,-3977.6) BA16(22.28,-3977.6) BA18(44.57,-3977.6) BA20(66.85,-3977.6) BA22(89.13,-3977.6) BA24(111.42,-3977.6) BA26(133.7,-3977.6) BA28(155.98,-3977.6) BA30(178.27,-3977.6) BA32(200.55,-3977.6) BA36(245.12,-3977.6) BA38(267.4,-3977.6) BA40(289.69,-3977.6) BB1(-144.84,-3988.74) BB3(-122.56,-3988.74) BB5(-100.28,-3988.74) BB7(-77.99,-3988.74) BB9(-55.71,-3988.74) BB13(-11.14,-3988.74) BB15(11.14,-3988.74) BB17(33.43,-3988.74) BB19(55.71,-3988.74) BB21(77.99,-3988.74) BB23(100.28,-3988.74) BB25(122.56,-3988.74) BB27(144.84,-3988.74) BB29(167.13,-3988.74) BB31(189.41,-3988.74) BB33(211.69,-3988.74) BB35(233.98,-3988.74) BB37(256.26,-3988.74) BB39(278.54,-3988.74) BC2(-133.7,-3999.88) BC4(-111.42,-3999.88) BC6(-89.13,-3999.88) BC8(-66.85,-3999.88) BC12(-22.28,-3999.88) BC14(0,-3999.88) BC16(22.28,-3999.88) BC18(44.57,-3999.88) BC20(66.85,-3999.88) BC22(89.13,-3999.88) BC24(111.42,-3999.88) BC26(133.7,-3999.88) BC28(155.98,-3999.88) BC30(178.27,-3999.88) BC32(200.55,-3999.88) BC34(222.83,-3999.88) BC36(245.12,-3999.88) BC38(267.4,-3999.88) BC40(289.69,-3999.88) BD1(-144.84,-4011.02) BD3(-122.56,-4011.02) BD5(-100.28,-4011.02) BD7(-77.99,-4011.02) BD9(-55.71,-4011.02) BD11(-33.43,-4011.02) BD13(-11.14,-4011.02) BD15(11.14,-4011.02) BD17(33.43,-4011.02) BD19(55.71,-4011.02) BD21(77.99,-4011.02) BD23(100.28,-4011.02) BD25(122.56,-4011.02) BD27(144.84,-4011.02) BD29(167.13,-4011.02) BD33(211.69,-4011.02) BD35(233.98,-4011.02) BD37(256.26,-4011.02) BD39(278.54,-4011.02) BE2(-133.7,-4022.17) BE4(-111.42,-4022.17) BE6(-89.13,-4022.17) BE8(-66.85,-4022.17) BE10(-44.57,-4022.17) BE12(-22.28,-4022.17) BE14(0,-4022.17) BE16(22.28,-4022.17) BE18(44.57,-4022.17) BE20(66.85,-4022.17) BE22(89.13,-4022.17) BE24(111.42,-4022.17) BE26(133.7,-4022.17) BE28(155.98,-4022.17) BE32(200.55,-4022.17) BE34(222.83,-4022.17) BE36(245.12,-4022.17) BE38(267.4,-4022.17) BE40(289.69,-4022.17) C2(-133.7,-3554.21) C4(-111.42,-3554.21) C6(-89.13,-3554.21) C8(-66.85,-3554.21) C10(-44.57,-3554.21) C12(-22.28,-3554.21) C14(0,-3554.21) C18(44.57,-3554.21) C20(66.85,-3554.21) C24(111.42,-3554.21) C26(133.7,-3554.21) C28(155.98,-3554.21) C32(200.55,-3554.21) C34(222.83,-3554.21) C36(245.12,-3554.21) C38(267.4,-3554.21) C40(289.69,-3554.21) D1(-144.84,-3565.35) D3(-122.56,-3565.35) D5(-100.28,-3565.35) D7(-77.99,-3565.35) D9(-55.71,-3565.35) D11(-33.43,-3565.35) D13(-11.14,-3565.35) D15(11.14,-3565.35) D17(33.43,-3565.35) D19(55.71,-3565.35) D21(77.99,-3565.35) D23(100.28,-3565.35) D25(122.56,-3565.35) D27(144.84,-3565.35) D29(167.13,-3565.35) D31(189.41,-3565.35) D33(211.69,-3565.35) D35(233.98,-3565.35) D37(256.26,-3565.35) D39(278.54,-3565.35) E2(-133.7,-3576.5) E4(-111.42,-3576.5) E6(-89.13,-3576.5) E8(-66.85,-3576.5) E10(-44.57,-3576.5) E12(-22.28,-3576.5) E14(0,-3576.5) E16(22.28,-3576.5) E18(44.57,-3576.5) E20(66.85,-3576.5) E22(89.13,-3576.5) E24(111.42,-3576.5) E26(133.7,-3576.5) E28(155.98,-3576.5) E30(178.27,-3576.5) E32(200.55,-3576.5) E34(222.83,-3576.5) E36(245.12,-3576.5) E38(267.4,-3576.5) E40(289.69,-3576.5) F1(-144.84,-3587.64) F3(-122.56,-3587.64) F5(-100.28,-3587.64) F7(-77.99,-3587.64) F11(-33.43,-3587.64) F15(11.14,-3587.64) F17(33.43,-3587.64) F19(55.71,-3587.64) F21(77.99,-3587.64) F23(100.28,-3587.64) F25(122.56,-3587.64) F27(144.84,-3587.64) F29(167.13,-3587.64) F31(189.41,-3587.64) F33(211.69,-3587.64) F35(233.98,-3587.64) F37(256.26,-3587.64) F39(278.54,-3587.64) G2(-133.7,-3598.78) G4(-111.42,-3598.78) G6(-89.13,-3598.78) G8(-66.85,-3598.78) G10(-44.57,-3598.78) G12(-22.28,-3598.78) G14(0,-3598.78) G16(22.28,-3598.78) G18(44.57,-3598.78) G20(66.85,-3598.78) G22(89.13,-3598.78) G24(111.42,-3598.78) G26(133.7,-3598.78) G28(155.98,-3598.78) G30(178.27,-3598.78) G32(200.55,-3598.78) G34(222.83,-3598.78) G36(245.12,-3598.78) G38(267.4,-3598.78) G40(289.69,-3598.78) H1(-144.84,-3609.92) H3(-122.56,-3609.92) H5(-100.28,-3609.92) H7(-77.99,-3609.92) H11(-33.43,-3609.92) H13(-11.14,-3609.92) H15(11.14,-3609.92) H17(33.43,-3609.92) H19(55.71,-3609.92) H21(77.99,-3609.92) H23(100.28,-3609.92) H25(122.56,-3609.92) H27(144.84,-3609.92) H29(167.13,-3609.92) H31(189.41,-3609.92) H33(211.69,-3609.92) H35(233.98,-3609.92) H37(256.26,-3609.92) H39(278.54,-3609.92) J2(-133.7,-3621.06) J4(-111.42,-3621.06) J6(-89.13,-3621.06) J8(-66.85,-3621.06) J10(-44.57,-3621.06) J12(-22.28,-3621.06) J14(0,-3621.06) J16(22.28,-3621.06) J18(44.57,-3621.06) J20(66.85,-3621.06) J22(89.13,-3621.06) J24(111.42,-3621.06) J26(133.7,-3621.06) J28(155.98,-3621.06) J30(178.27,-3621.06) J32(200.55,-3621.06) J34(222.83,-3621.06) J36(245.12,-3621.06) J38(267.4,-3621.06) J40(289.69,-3621.06) K1(-144.84,-3632.2) K3(-122.56,-3632.2) K5(-100.28,-3632.2) K7(-77.99,-3632.2) K9(-55.71,-3632.2) K11(-33.43,-3632.2) K15(11.14,-3632.2) K17(33.43,-3632.2) K19(55.71,-3632.2) K21(77.99,-3632.2) K23(100.28,-3632.2) K25(122.56,-3632.2) K27(144.84,-3632.2) K29(167.13,-3632.2) K31(189.41,-3632.2) K33(211.69,-3632.2) K35(233.98,-3632.2) K37(256.26,-3632.2) K39(278.54,-3632.2) L2(-133.7,-3643.35) L4(-111.42,-3643.35) L6(-89.13,-3643.35) L8(-66.85,-3643.35) L30(178.27,-3643.35) L32(200.55,-3643.35) L34(222.83,-3643.35) L36(245.12,-3643.35) L38(267.4,-3643.35) L40(289.69,-3643.35) M1(-144.84,-3654.49) M3(-122.56,-3654.49) M5(-100.28,-3654.49) M7(-77.99,-3654.49) M9(-55.71,-3654.49) M11(-33.43,-3654.49) M13(-11.14,-3654.49) M15(11.14,-3654.49) M17(33.43,-3654.49) M19(55.71,-3654.49) M21(77.99,-3654.49) M23(100.28,-3654.49) M25(122.56,-3654.49) M27(144.84,-3654.49) M29(167.13,-3654.49) M31(189.41,-3654.49) M33(211.69,-3654.49) M35(233.98,-3654.49) M37(256.26,-3654.49) M39(278.54,-3654.49) N2(-133.7,-3665.63) N4(-111.42,-3665.63) N6(-89.13,-3665.63) N8(-66.85,-3665.63) N14(0,-3665.63) N22(89.13,-3665.63) N24(111.42,-3665.63) N26(133.7,-3665.63) N28(155.98,-3665.63) N30(178.27,-3665.63) N32(200.55,-3665.63) N34(222.83,-3665.63) N36(245.12,-3665.63) N38(267.4,-3665.63) N40(289.69,-3665.63) P3(-122.56,-3676.77) P5(-100.28,-3676.77) P7(-77.99,-3676.77) P9(-55.71,-3676.77) P11(-33.43,-3676.77) P13(-11.14,-3676.77) P15(11.14,-3676.77) P17(33.43,-3676.77) P19(55.71,-3676.77) P21(77.99,-3676.77) P23(100.28,-3676.77) P25(122.56,-3676.77) P27(144.84,-3676.77) P29(167.13,-3676.77) P31(189.41,-3676.77) P33(211.69,-3676.77) P35(233.98,-3676.77) P37(256.26,-3676.77) P39(278.54,-3676.77) R4(-111.42,-3687.91) R6(-89.13,-3687.91) R8(-66.85,-3687.91) R22(89.13,-3687.91) R24(111.42,-3687.91) R26(133.7,-3687.91) R28(155.98,-3687.91) R30(178.27,-3687.91) R32(200.55,-3687.91) R34(222.83,-3687.91) R36(245.12,-3687.91) R38(267.4,-3687.91) R40(289.69,-3687.91) T1(-144.84,-3699.06) T3(-122.56,-3699.06) T5(-100.28,-3699.06) T7(-77.99,-3699.06) T9(-55.71,-3699.06) T11(-33.43,-3699.06) T13(-11.14,-3699.06) T15(11.14,-3699.06) T17(33.43,-3699.06) T19(55.71,-3699.06) T21(77.99,-3699.06) T23(100.28,-3699.06) T25(122.56,-3699.06) T27(144.84,-3699.06) T29(167.13,-3699.06) T31(189.41,-3699.06) T33(211.69,-3699.06) T35(233.98,-3699.06) T37(256.26,-3699.06) T39(278.54,-3699.06) U2(-133.7,-3710.2) U4(-111.42,-3710.2) U6(-89.13,-3710.2) U8(-66.85,-3710.2) U22(89.13,-3710.2) U24(111.42,-3710.2) U26(133.7,-3710.2) U28(155.98,-3710.2) U30(178.27,-3710.2) U32(200.55,-3710.2) U34(222.83,-3710.2) U36(245.12,-3710.2) U38(267.4,-3710.2) U40(289.69,-3710.2) V1(-144.84,-3721.34) V3(-122.56,-3721.34) V5(-100.28,-3721.34) V7(-77.99,-3721.34) V9(-55.71,-3721.34) V11(-33.43,-3721.34) V13(-11.14,-3721.34) V15(11.14,-3721.34) V17(33.43,-3721.34) V19(55.71,-3721.34) V21(77.99,-3721.34) V23(100.28,-3721.34) V25(122.56,-3721.34) V27(144.84,-3721.34) V29(167.13,-3721.34) V31(189.41,-3721.34) V33(211.69,-3721.34) V35(233.98,-3721.34) V37(256.26,-3721.34) V39(278.54,-3721.34) W2(-133.7,-3732.48) W4(-111.42,-3732.48) W6(-89.13,-3732.48) W8(-66.85,-3732.48) W16(22.28,-3732.48) W22(89.13,-3732.48) W24(111.42,-3732.48) W26(133.7,-3732.48) W28(155.98,-3732.48) W30(178.27,-3732.48) W32(200.55,-3732.48) W34(222.83,-3732.48) W36(245.12,-3732.48) W38(267.4,-3732.48) W40(289.69,-3732.48) Y1(-144.84,-3743.62) Y3(-122.56,-3743.62) Y5(-100.28,-3743.62) Y9(-55.71,-3743.62) Y11(-33.43,-3743.62) Y13(-11.14,-3743.62) Y15(11.14,-3743.62) Y17(33.43,-3743.62) Y19(55.71,-3743.62) Y21(77.99,-3743.62) Y23(100.28,-3743.62) Y25(122.56,-3743.62) Y27(144.84,-3743.62) Y29(167.13,-3743.62) Y31(189.41,-3743.62) Y33(211.69,-3743.62) Y35(233.98,-3743.62) Y37(256.26,-3743.62) Y39(278.54,-3743.62)
TP [mm]
  round 1.5 smd paste-1: 1(0,0)

## Part data
C15 C34 C50 C51 C62 C64 C65 C66 C67 C68 C69 C70 C71 C72 C73 C74 C75 C76 C77 C78 C79: library part Cap_0.1uF_6.3V, "CAP CER 0.1UF 6.3V X5R 0201"
C16 C17: library part Cap_33pF_50V, "CAP CER 33PF 50V C0G/NP0 0201"
C18 C19 C20 C21 C22 C52 C53 C54 C55 C56 C57 C58 C59 C60 C61: library part Cap_1uF_6.3V, "CAP CER 1UF 6.3V X5R 0402"
C23 C41: library part Cap_4700pF_10V, "CAP CER 4700PF 10V X7R 0201"
C24 C25 C26 C28 C29: library part Cap_0.047uF_6.3V, "CAP CER 20PF 50V C0G/NP0 0603"
C27 C35: library part Cap_4.7uF_10V, "CAP CER 4.7UF 10V X5R 0402"
C30 C31 C32 C33 C38 C39 C40: library part Cap_0.022uF_6.3V, "CAP CER 0.022UF 6.3V X5R 0201"
C36 C37 C47 C48 C49: library part Cap_22uF_6.3V, "CAP CER 22UF 6.3V X5R 0603"
C42 C43 C44: library part Cap_2200pF_10V, "CAP CER 2200PF 10V X7R 0201"
C45: library part Cap_0.01uF_6.3V, "CAP CER 10000PF 6.3V X5R 0201"
C46: library part Cap_4700pF_50V, "CAP CER 4700PF 50V X7R 0402"
C63: library part Cap_2.2uF_10V, "CAP CER 2.2UF 10V X5R 0402"
R13 R15 R17 R18 R19 R20: library part Res_10K_0.050W, "RES SMD 0.0OHM JUMPER 1/16W 0402"
R14 R16: library part Res_0_0.1W, "RES 0 OHM JUMPER 0603"
R21 R22 R24 R25 R26 R27 R28: library part Res_0_0.050W, "RES SMD 0 OHM JUMPER 1/20W 0201"
R23: library part Res_200_0.050W, "RES SMD 100K OHM 1% 1/10W 0603"
R29: library part Res_3.92K_0.050W, "RES SMD 0.0OHM JUMPER 1/16W 0402"
TP2: library part TP, "Test Point"

## Via types
v1: diameter 2, hole 1, Top Layer to Bottom Layer, 573 vias

## Nets (pads, with @x,y where several pads share a name; then routed paths per layer and width w, separated by ;. In a path a pad name is that pad's centre, name@x,y a point inside that pad or via, vN(x,y) a via of type N, cw(c..) or ccw(c..) an arc to the next point about the centre after c; other vN are vias at no path point)
CLK: TP2.1 U4.AD35 U4.AL34 | length 950.5
  Top Layer w2: U4.AL34@3932.12,3031.58 v1(3932.12,3037.52) ; U4.AD35@3943.27,3109.57 v1(3943.27,3115.51) ; v1(4660,3089.18) TP2.1@4660,3120.71
  Layer 2 w2: v1(3932.12,3037.52) 3938.96,3044.35 3938.96,3101.03 3943,3105.07 3943,3115.24 v1(3943.27,3115.51) 3960,3132.24 3960,3137.69 3961.17,3138.86 3962.83,3138.86 3975.04,3126.65 3980,3126.65 3991.41,3115.24
  Layer 2 w3.5: 3991.41,3115.24 4205.24,3115.24 4295,3205 4544.18,3205 v1(4660,3089.18)
CLK_EN: U4.A36